# Altium PCB 舱内通信板.PcbDoc
Units mm, origin at the board's own origin, x right, y up, seen from the top; angles counter-clockwise.
Board outline 80.68 x 81.51 mm, 2 copper layers (Top Layer, Bottom Layer); 35 components, 69 nets, 221 pads, 77 vias.
Unrouted connection lines stored in the file: 1.
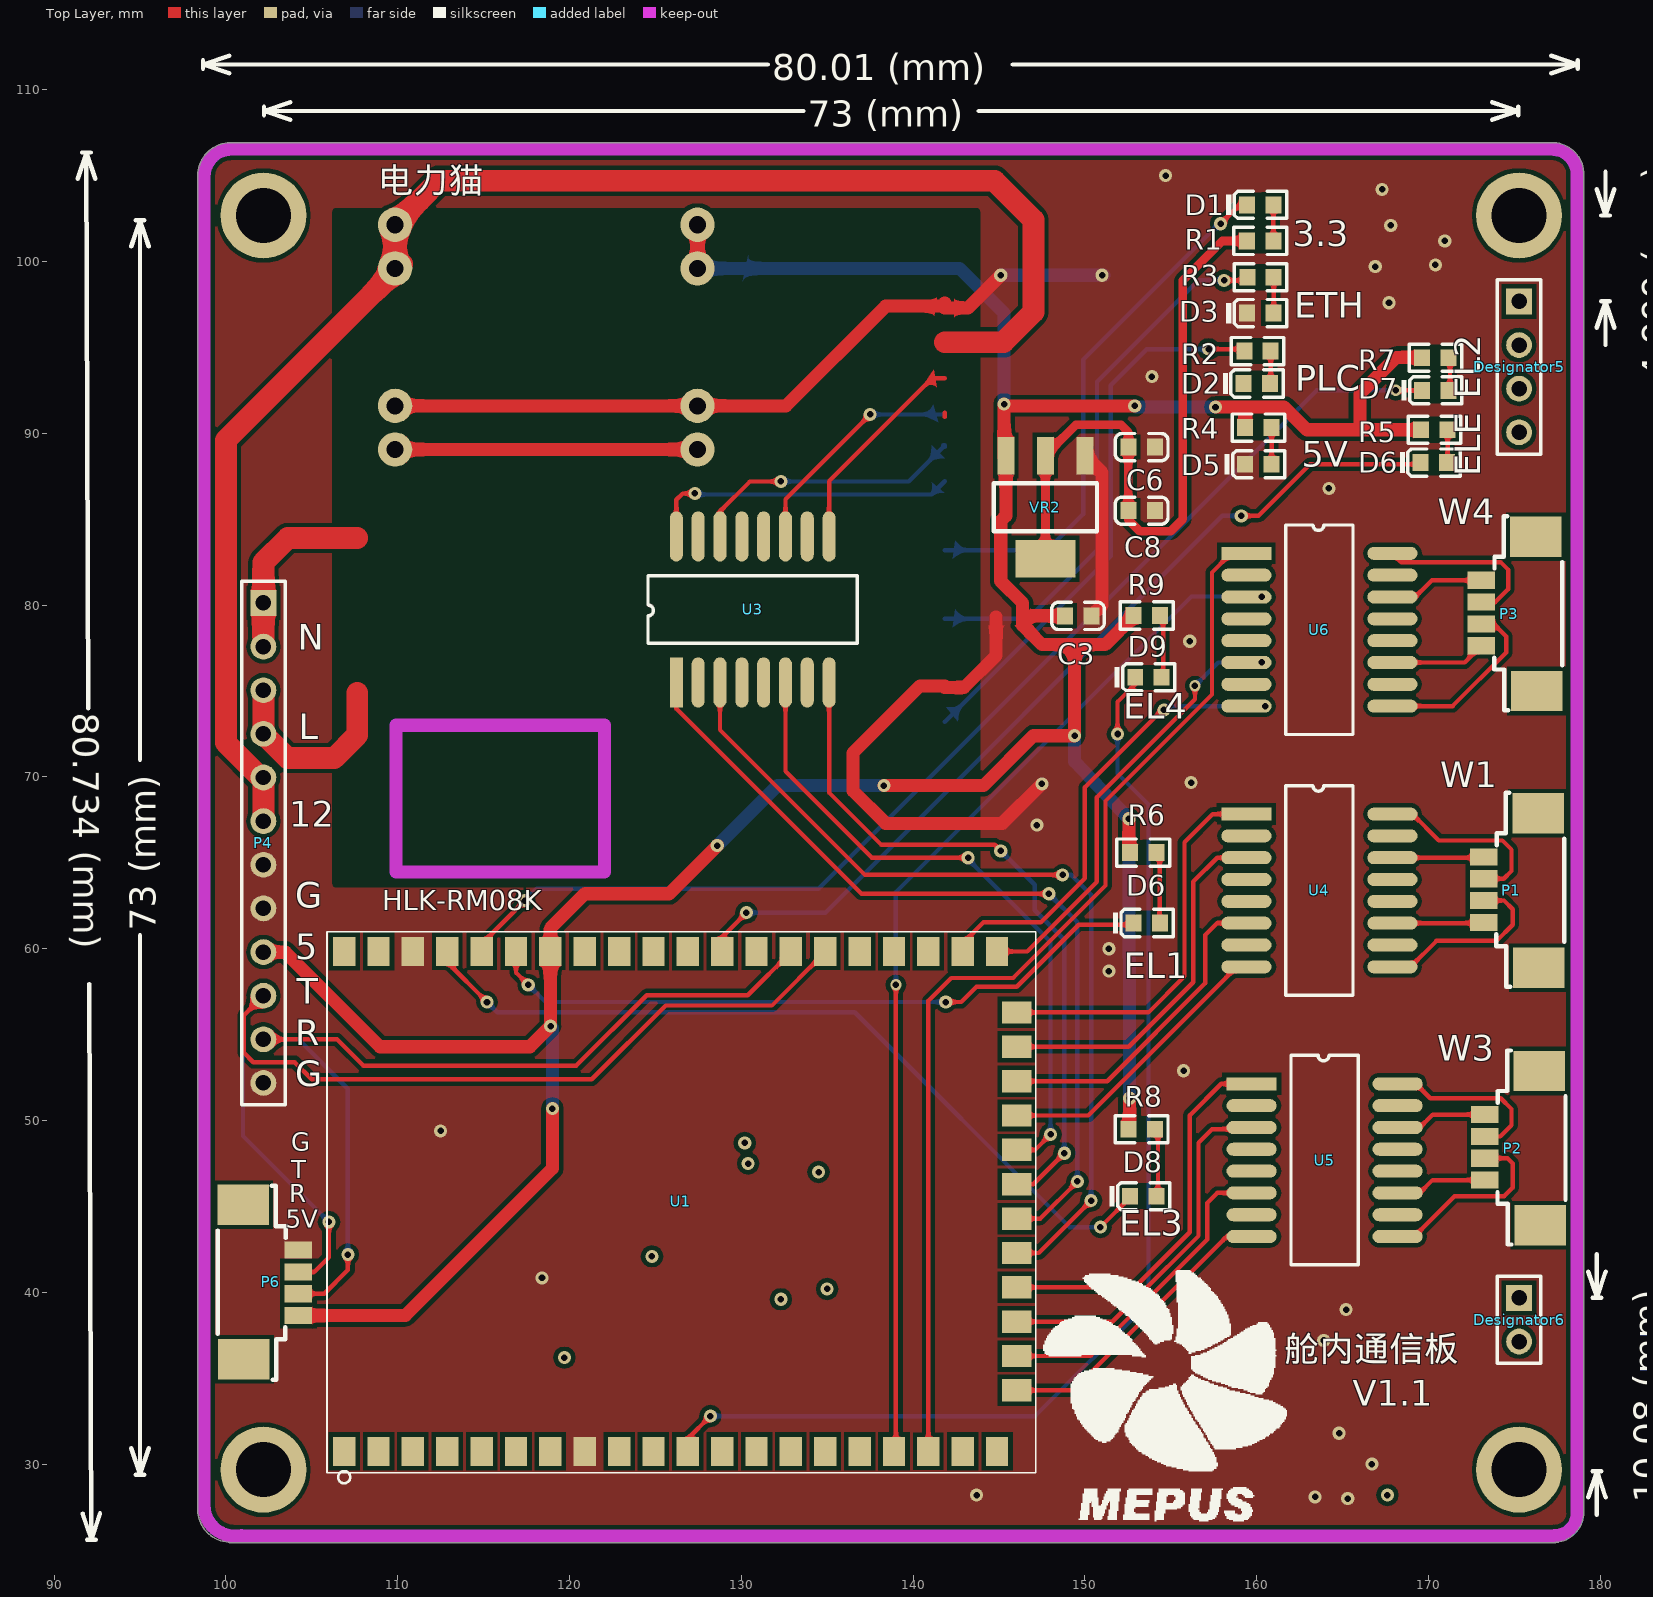
[diagram p0: Top Layer view]
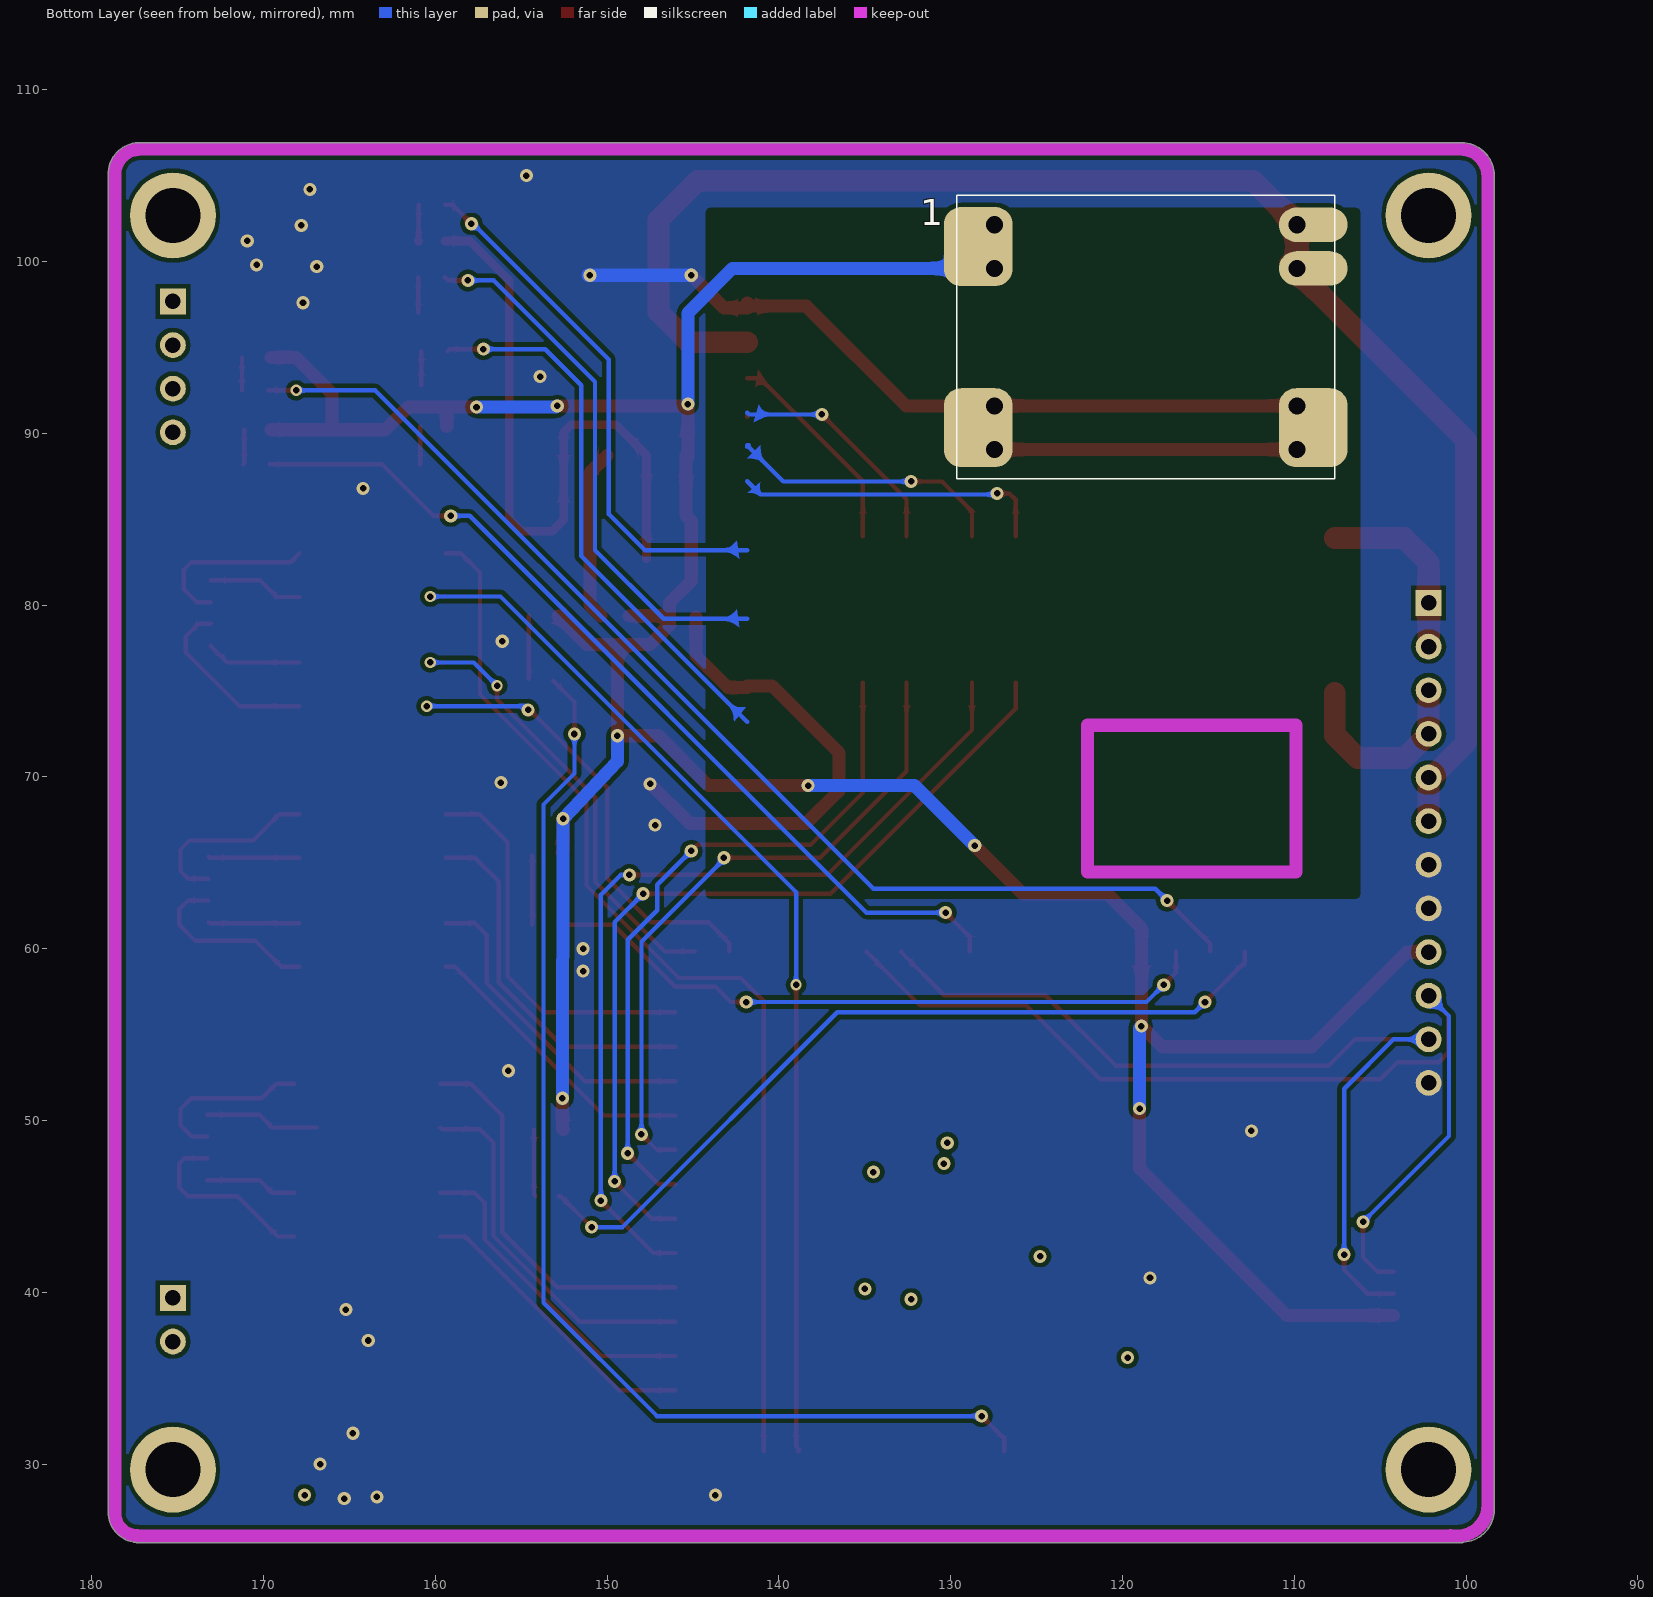
[diagram p1: Bottom Layer view, seen from below]
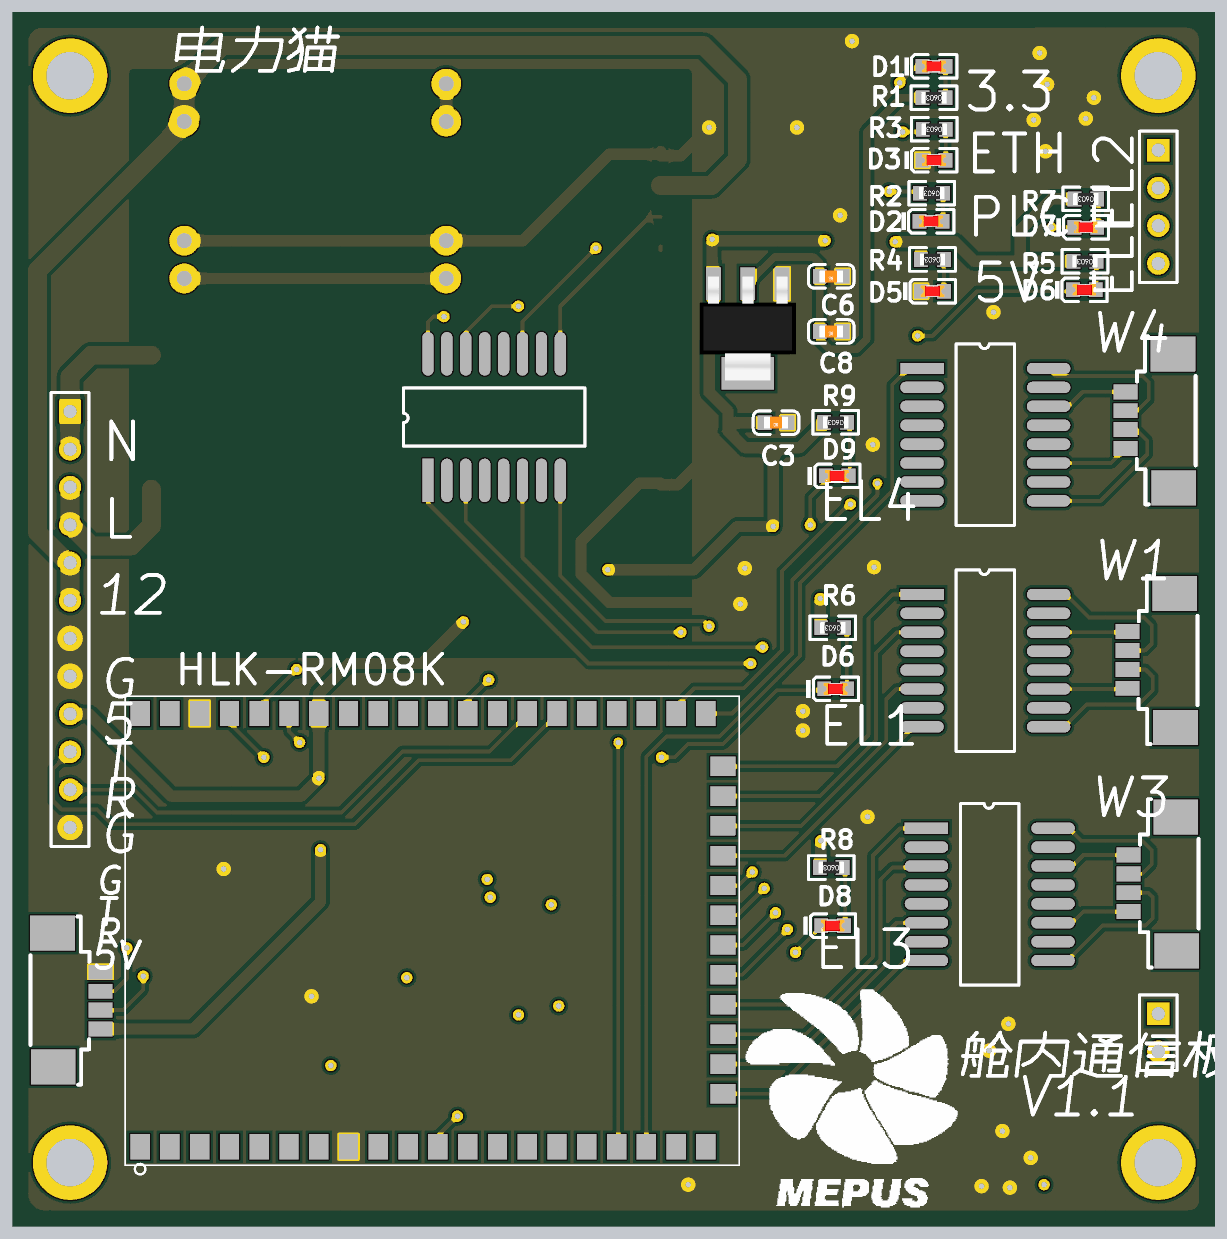
[diagram p2: 3D render of the assembled board from above, using the file's embedded part models]

## Layer stack, top to bottom
Top Solder: solder mask 0.0102, Solder Resist, Dk 3.5
Top Layer: signal copper 0.0356
Dielectric 1: dielectric 0.32, FR-4, Dk 4.8
Bottom Layer: signal copper 0.0356
Bottom Solder: solder mask 0.0102, Solder Resist, Dk 3.5

## Board outline
98.356,27.35 ccw(c100.273,27.375) 100.149,25.462 ccw(c100.33,25.798) 100.33,25.417 177.272,25.417 ccw(c177.272,25.798) 177.429,25.451 ccw(c177.272,27.212) 179.04,27.212 ccw(c178.658,27.212) 179.04,27.221 ccw(c178.658,27.225) 179.04,27.225 ccw(c178.658,27.225) 179.04,27.229 179.033,27.937 ccw(c178.659,28.011) 179.04,28.011 179.04,105.08 ccw(c177.19,105.08) 177.317,106.925 ccw(c177.291,106.545) 177.196,106.914 100.283,106.914 ccw(c100.283,106.533) 100.261,106.914 ccw(c100.283,104.987) 98.356,104.987 98.356,27.355 ccw(c98.738,27.355)

## Design rules (kind name [scope] priority, off if disabled: settings)
Clearance [All] p1: gap=0.254 ignorepadtopadclearanceinfootprint=FALSE
ComponentClearance [All] p1 off: gap=0.254 collisioncheckmode=3 verticalgap=0.254 showdistances=FALSE
Height [All] p1 off: minheight=0 maxheight=25.4 prefheight=12.7
HoleSize [All] p1: absolutevalues=TRUE maxlimit=12.7 minlimit=0.025 maxpercent=80.000 minpercent=20.000
PlaneConnect [All] p1: planeconnectstyle=Direct reliefexpansion=0.508 reliefentries=4 reliefconductorwidth=0.254 reliefairgap=0.254
PolygonConnect [All] p1: connectstyle=Direct reliefconductorwidth=0.254 reliefentries=4 polygonreliefangle="90 Angle" airgapwidth=0.254
RoutingVias [All] p1: holewidth=0.711 width=1.27 viastyle="Through Hole" minholewidth=0.711 minwidth=1.27 maxholewidth=0.711 maxwidth=1.27
SolderMaskExpansion [All] p1: expansion=0.102
UnRoutedNet [All] p1: checkbadconnections=TRUE
Width [All] p1: maxlimit=12.7 minlimit=0.254 preferedwidth=0.254 minimp=50.000000 maximp=50.000000 favimp=50.000000
25 further rules are at their usual default settings.

## Classes and differential pairs
component class 舱内通信板: 1 C3 C6 C8 D1 D5 OUT1 P1 P2 P3 P4 P6 R1 R2 R3 R4 R5 R6 R7 R8 R9 U1 U3 U4 U5 U6 VR2

## Components (designator, comment, footprint, x,y, rotation, side; value= is the part's Value field where it differs from the comment)
1 "12-5稳压" 12-5稳压 117.6,93.7 r180 bottom
C3 "100nF (104) 10% 50V" LC-0603_C 149.6,79.375 r180 top
C6 "10uF (106) 10% 10V" LC-0603_C 153.3,89.2 r180 top
C8 "100nF (104) 10% 50V" LC-0603_C 153.3,85.5 r180 top
D1 "红灯 0603" LC-0603_LED_S1 160.2,103.3 r0 top
D2 "Comment" LC-0603_LED_S1 160,92.9 r0 top
D3 "Comment" LC-0603_LED_S1 160.2,97 r0 top
D5 "红灯 0603" LC-0603_LED_S1 160.1,88.2 r0 top
D6 "Comment" LC-0603_LED_S1 170.3,88.3 r0 top
D6 "Comment" LC-0603_LED_S1 153.6,61.5 r0 top
D7 "Comment" LC-0603_LED_S1 170.4,92.5 r0 top
D8 "Comment" LC-0603_LED_S1 153.4,45.6 r0 top
D9 "Comment" LC-0603_LED_S1 153.7,75.8 r0 top
Designator5 "Comment" HDR1X4 175.268,97.68 r270 top
Designator6 "Comment" HDR1X2 175.268,39.68 r270 top
P1 "Header 4" Molex-4 175.523,62.2 r270 top
P2 "Header 4" Molex-4 175.6,47.2 r270 top
P3 "Header 4" Molex-4 175.4,78.3 r270 top
P4 "Header 12" HDR1X12 102.184,80.129 r270 top
P6 "Header 4" Molex-4 101.9,41.8 r90 top
R1 "1KΩ (1001) ±1%" LC-0603_R 160.2,101.2 r180 top
R2 "1KΩ (1001) ±1%" LC-0603_R 160.045,94.787 r180 top
R3 "1KΩ (1001) ±1%" LC-0603_R 160.22,99.084 r180 top
R4 "1KΩ (1001) ±1%" LC-0603_R 160.1,90.334 r180 top
R5 "1KΩ (1001) ±1%" LC-0603_R 170.342,90.208 r180 top
R6 "1KΩ (1001) ±1%" LC-0603_R 153.4,65.6 r180 top
R7 "1KΩ (1001) ±1%" LC-0603_R 170.4,94.4 r180 top
R8 "1KΩ (1001) ±1%" LC-0603_R 153.3,49.5 r180 top
R9 "1KΩ (1001) ±1%" LC-0603_R 153.6,79.4 r180 top
U1 "HLK-RM08K" RM08k 126.4,45.3 r0 top
U3 "H1102NL" H1102NL 126.22,75.5 r90 top
U4 "H1102NL" H1102NL 159.4,67.84 r0 top
U5 "H1102NL" H1102NL 159.7,52.14 r0 top
U6 "H1102NL" H1102NL 159.4,83.014 r0 top
VR2 "AMS1117-3.3" LC-SOT-223 147.7,85.7 r90 top

## Footprints (in the part's own frame and the unit in brackets; to place one, negate y for a bottom-side part, rotate by r counter-clockwise, add the part's x,y. Pads: shape width x height; smd on the part's side, far side on the other; paste and mask are expansions set on the pad)
12-5稳压 [mm]
  round 2 hole 1: EN(7.75,8.44) VI+(7.75,5.9) VI-(7.75,-4.64) VI-(7.75,-2.1) VO+(-9.85,5.9) VO+(-9.85,8.44) VO-(-9.85,-4.64) VO-(-9.85,-2.1)
  oval 4x2 smd: EN(8.7,8.44) VI+(8.7,5.9)
  rrect50% 4x4.6 smd: VI-(8.7,-3.37) VO+(-10.8,7.17) VO-(-10.8,-3.37)
  silkscreen extent -12.05,-6.35 9.95,10.15
H1102NL [mm]
  rect 2.92x0.76 smd: 1(0,0)
  oval 2.92x0.76 smd: 2(0,-1.27) 3(0,-2.54) 4(0,-3.81) 5(0,-5.08) 6(0,-6.35) 7(0,-7.62) 8(0,-8.89) 9(8.5,-8.89) 10(8.5,-7.62) 11(8.5,-6.35) 12(8.5,-5.08) 13(8.5,-3.81) 14(8.5,-2.54) 15(8.5,-1.27) 16(8.5,0)
  silkscreen extent 2.29,-10.54 6.21,1.65
HDR1X2 [mm] "Connector; Header; 2 Position"
  rect 1.5x1.5 hole 0.9: 1(0,0)
  round 1.5 hole 0.9: 2(2.54,0)
  silkscreen extent -1.27,-1.27 3.81,1.27
HDR1X4 [mm] "Connector; Header; 4 Position"
  rect 1.5x1.5 hole 0.9: 1(0,0)
  round 1.5 hole 0.9: 2(2.54,0) 3(5.08,0) 4(7.62,0)
  silkscreen extent -1.27,-1.27 8.89,1.27
HDR1X12 [mm] "Connector; Header; 12 Position"
  rect 1.5x1.5 hole 0.9: 1(0,0)
  round 1.5 hole 0.9: 2(2.54,0) 3(5.08,0) 4(7.62,0) 5(10.16,0) 6(12.7,0) 7(15.24,0) 8(17.78,0) 9(20.32,0) 10(22.86,0) 11(25.4,0) 12(27.94,0)
  silkscreen extent -1.27,-1.27 29.21,1.27
LC-0603_C [mm]
  rect 0.93x0.98 smd: 1(-0.77,0) 2(0.77,0)
  silkscreen extent -1.53,-0.79 1.54,0.79, body extent -0.8,-0.4 0.8,0.4, height 0.3
LC-0603_LED_S1 [mm]
  rect 0.93x0.98 smd: A(0.77,0) K(-0.77,0)
  silkscreen extent -1.97,-0.79 1.54,0.79, body extent -0.8,-0.4 0.8,0.4, height 0.6
LC-0603_R [mm]
  rect 0.93x0.98 smd: 1(-0.77,0) 2(0.77,0)
  silkscreen extent -1.53,-0.79 1.54,0.79, body extent -0.85,-0.4 0.85,0.4, height 0.56
LC-SOT-223 [mm]
  rect 2.2x1 smd: 1(3,-2.3) 2(3,0) 3(3,2.3)
  rect 2.2x3.5 smd: 2(-3,0)
  silkscreen extent -1.4,-3 1.4,3, body extent -3.49,-3.24 3.49,3.24, height 1.64
Molex-4 [mm]
  rect 2.35x3 smd: 0(-5.687,0.852) 0(3.3,0.901)
  rect 1x1.6 smd: 1(-3.147,-2.323) 2(-1.877,-2.323) 3(-0.607,-2.323) 4(0.663,-2.323)
  silkscreen extent -6.88,-1.58 4.41,2.38
RM08k [mm]
  rect 1.3x1.7 smd: 1(-19.513,-14.555) 2(-17.513,-14.555) 3(-15.513,-14.555) 4(-13.513,-14.555) 5(-11.513,-14.555) 6(-9.513,-14.555) 7(-7.513,-14.555) 8(-5.513,-14.555) 9(-3.513,-14.555) 10(-1.513,-14.555) 11(0.487,-14.555) 12(2.487,-14.555) 13(4.487,-14.555) 14(6.487,-14.555) 15(8.487,-14.555) 16(10.487,-14.555) 17(12.487,-14.555) 18(14.487,-14.555) 19(16.487,-14.555) 20(18.487,-14.555) 33(18.487,14.545) 34(16.487,14.545) 35(14.487,14.545) 36(12.487,14.545) 37(10.487,14.545) 38(8.487,14.545) 39(6.487,14.545) 40(4.487,14.545) 41(2.487,14.545) 42(0.487,14.545) 43(-1.513,14.545) 44(-3.513,14.545) 45(-5.513,14.545) 46(-7.513,14.545) 47(-9.513,14.545) 48(-11.513,14.545) 49(-13.513,14.545) 50(-15.513,14.545) 51(-17.513,14.545) 52(-19.513,14.545)
  rect 1.7x1.3 smd: 21(19.637,-11.005) 22(19.637,-9.005) 23(19.637,-7.005) 24(19.637,-5.005) 25(19.637,-3.005) 26(19.637,-1.005) 27(19.637,0.995) 28(19.637,2.995) 29(19.637,4.995) 30(19.637,6.995) 31(19.637,8.995) 32(19.637,10.995)
  silkscreen extent -20.51,-16.41 20.74,15.7

## Part data
C3 C8: library part "0603 100nF (104) 10% 50V", "贴片电容", Package=0603, SuppliersPartNumber=C14663, ComponentLink1Description=供应商, ComponentLink1URL=http://www.szlcsc.com/product/details_15331.html, Supplier=LC
C6: library part "0603 10uF (106) 10% 10V", "贴片电容", Package=0603, SuppliersPartNumber=C19702, ComponentLink1Description=供应商, ComponentLink1URL=http://www.szlcsc.com/product/details_20411.html, Supplier=LC
D1 D5: library part "0603 红灯", "发光二极管", Package=0603, SuppliersPartNumber=C2286, ComponentLink1Description=供应商, ComponentLink1URL=http://www.szlcsc.com/product/details_2659.html, Supplier=LC
D2 D3: library part "0603 绿灯", "发光二极管"
D6 D7 D8 D9: library part "0603 蓝灯", "发光二极管"
P1 P2 P3 P6: "Header, 4-Pin", LatestRevisionDate=17-Jul-2002, LatestRevisionNote="Re-released for DXP Platform.", Publisher="Altium Limited"
P4: "Header, 12-Pin", LatestRevisionDate=17-Jul-2002, LatestRevisionNote="Re-released for DXP Platform.", Publisher="Altium Limited"
R1 R2 R3 R4 R5 R6 R7 R8 R9: library part "0603 1KΩ (1001) 1%", "贴片电阻", Package=0603, SuppliersPartNumber=C21190, ComponentLink1Description=供应商, ComponentLink1URL=http://www.szlcsc.com/product/details_21904.html, Supplier=LC
U1: library part RM08K, "RM08K WIFI MODEL"
U3 U4 U5 U6: "网口变压器"
VR2: library part "SOT-223 AMS1117-3.3", "低压差线性稳压(LDO)", Package=SOT-223, SuppliersPartNumber=C6186, ComponentLink1Description=供应商, ComponentLink1URL=http://www.szlcsc.com/product/details_6652.html, Supplier=LC

## Free pads (board coordinates)
  round 5 hole 3.2: 1(102.184,102.679) ""(102.184,29.68) ""(175.268,29.68) ""(175.268,102.679)

## Via types
v1: diameter 0.762, hole 0.381, Top Layer to Bottom Layer, 71 vias
v2: diameter 0.66, hole 0.381, Top Layer to Bottom Layer, 6 vias

## Nets (pads, with @x,y where several pads share a name; then routed paths per layer and width w, separated by ;. In a path a pad name is that pad's centre, name@x,y a point inside that pad or via, vN(x,y) a via of type N, cw(c..) or ccw(c..) an arc to the next point about the centre after c; other vN are vias at no path point)
3.3V: C6.2 C8.2 R1.2 VR2.2 | length 39.2
  Top Layer w0.508: VR2.2@147.7,82.7 147.7,88.7 147.7,88.718 149.482,90.5 152.1,90.5 152.53,90.07 C6.2 C8.2 152.53,84.97 153.2,84.3 155,84.3 155.7,85 155.7,98.9 158,101.2 R1.2
+5V: 1.VO+ C3.2 P4.9 P6.1 R4.2 R5.2 R6.2 R7.2 R8.2 R9.2 U1.46 VR2.3 | length 201.4
  Top Layer w0.762: P4.9 103.46,59.809 108.974,54.295 117.695,54.295 118.887,55.487 U1.46 118.887,61.187 120.9,63.2 125.8,63.2 v1(128.6,66) ; P6.1 110.44,38.653 119,47.213 v1(119,50.7) ; 1.VO+@127.45,99.6 1.VO+@127.45,102.14 ; v1(138.3,69.5) 144.1,69.5 147,72.4 v1(149.4,72.4) 149.4,77.7 ; 146.625,79.375 C3.2@148.73,79.375 ; R8.2@152.55,49.475 152.6,49.525 v1(152.6,51.3) ; v1(152.56,67.57) 152.56,65.67 R6.2 ; R9.2@152.85,79.375 151.175,77.7 149.4,77.7 ; v1(152.9,91.6) 145.4,91.6 v1(145.3,91.7) 145.3,88.6 VR2.3 145.4,85.2 145.1,84.9 145.1,81.4 146.37,80.13 146.37,79.3 146.37,78.83 147.5,77.7 149.4,77.7 ; v1(157.6,91.525) 159.196,91.525 ; R4.2@159.33,90.4 159.33,91.391 159.196,91.525 ; R7.2@169.55,94.425 168.125,94.425 166,92.3 166,90.308 165.9,90.208 ; R5.2 165.9,90.208 ; 159.196,91.525 161.598,91.525 162.915,90.208 165.9,90.208
  Bottom Layer w0.762: v1(118.9,55.5) 119,55.4 v1(119,50.7) ; 1.VO+@127.45,99.6 142.7,99.6 145.3,97 v1(145.3,91.7) ; v1(128.6,66) 132.1,69.5 v1(138.3,69.5) ; v1(149.4,72.4) 149.4,70.9 v1(152.56,67.57) v1(152.6,51.3) ; v1(152.9,91.6) 152.975,91.525 v1(157.6,91.525)
+12V: 1.EN 1.VI+ P4.5 P4.6 | length 91.3
  Top Layer w1.27: P4.6 P4.5@102.184,69.816 ; P4.5 P4.5@102.184,69.816 ; 1.VI+@109.85,99.6 109.85,102.14 111.739,104.029 ; 1.VI+@110.25,99.85 109.925,99.525 100,89.6 100,72 P4.5@102.184,69.816 ; 111.3,103.6 112.4,104.7 144.73,104.7 147,102.43 147,97.051 145.253,95.304 141.844,95.304
EL1: D6.K@152.83,61.5 U1.47 | length 39.7
  Top Layer w0.254: U1.47 116.887,58.613 v1(117.6,57.9) ; v1(141.9,56.9) 142.8,56.9 143.692,57.792 146.029,57.792 149.637,61.4 D6.K@152.83,61.4
  Bottom Layer w0.254: v1(117.6,57.9) 118.6,56.9 v1(141.9,56.9)
EL2: D7.K U1.48 | length 68.6
  Top Layer w0.254: U1.48 114.887,60.287 v1(117.4,62.8) ; v2(168.1,92.5) D7.K@169.73,92.5
  Bottom Layer w0.254: v1(117.4,62.8) 118.1,63.5 134.5,63.5 163.5,92.5 v2(168.1,92.5)
EL3: D8.K U1.49 | length 47.7
  Top Layer w0.254: U1.49 112.887,59.213 v1(115.2,56.9) ; v1(150.9,43.8) 152.7,45.6 D8.K@152.83,45.6
  Bottom Layer w0.254: v1(115.2,56.9) 115.8,56.3 136.6,56.3 149.1,43.8 v1(150.9,43.8)
EL4: D9.K U1.11 | length 68.3
  Top Layer w0.254: U1.11 126.887,31.487 v1(128.2,32.8) ; v1(151.9,72.5) 151.9,74.37 D9.K@153.13,75.6
  Bottom Layer w0.254: v1(128.2,32.8) 147.1,32.8 153.7,39.4 153.7,68.4 151.9,70.2 v1(151.9,72.5)
ELED0: D6.K@169.53,88.3 U1.41 | length 53
  Top Layer w0.254: U1.41 128.887,60.687 v1(130.3,62.1) ; v1(159.1,85.2) 160.1,85.2 163.1,88.2 D6.K@169.63,88.2
  Bottom Layer w0.254: v1(130.3,62.1) 134.9,62.1 158,85.2 v1(159.1,85.2)
ES0: U1.16
ES1: U1.43
ETH2: R3.2 | length 31.6
  Top Layer w0.254: v1(158.1,98.9) 159.266,98.9 R3.2
  Bottom Layer w0.254: 141.844,79.204 146.704,79.204 150.7,83.2 150.7,93 156.6,98.9 v1(158.1,98.9)
GND: 1.VI- 1.VO- C3.1 C6.1 C8.1 D3.K D5.K P4.7 P4.8 P4.12 P6.4 U1.8 U1.50 VR2.1 | length 100.3
  Top Layer w0.762: 1.VI-@109.85,89.06 1.VO-@127.45,89.06 ; 1.VI-@109.85,91.6 127.45,91.6 132.6,91.6 138.4,97.4 141.664,97.4 141.844,97.58 141.844,97.304 143.204,97.304 v1(145.1,99.2) ; 141.844,75.204 142.964,75.204 144.83,77.07 144.83,79.3 ; 141.844,75.304 140.4,75.304 136.5,71.404 136.5,69.2 138.4,67.3 145.2,67.3 v1(147.5,69.6) ; VR2.1 151,87.7 151,80.005 C3.1
  Bottom Layer w0.762: v1(145.1,99.2) v1(151,99.2) v1@151.1,99.2
  other v1: 165.3,28 163.4,28.1 143.7,28.2 166.7,30 164.8,31.8 163.9,37.2 165.2,39 118.4,40.847 112.5,49.4 155.741,52.9 151.4,58.7 151.4,60 147.2,67.2 156.179,69.675 156.1,77.9 164.2,86.8 153.9,93.3 167.7,97.6 166.9,99.7 170.4,99.8 170.942,101.2 167.8,102.1 167.3,104.2 154.7,105
L: P4.3 P4.4 | length 11.6
  Top Layer w1.27: P4.3 P4.4 103.593,71.1 106.3,71.1 107.644,72.444 107.644,74.904
N: P4.1 P4.2 | length 10.9
  Top Layer w1.27: P4.2 P4.1 102.184,82.484 103.604,83.904 107.644,83.904
NetD1_A: D1.A R1.1 | length 2.1
  Top Layer w0.254: R1.1 D1.A
NetD1_K: D1.K | length 31.1
  Top Layer w0.254: v1(157.9,102.2) 159,103.3 D1.K
  Bottom Layer w0.254: 141.844,83.204 147.804,83.204 149.9,85.3 149.9,94.3 v1@157.8,102.2
NetD2_A: D2.A R2.1 | length 2
  Top Layer w0.254: D2.A@160.815,92.806 R2.1
NetD3_A: D3.A R3.1 | length 2.1
  Top Layer w0.254: D3.A@160.99,97.02 R3.1
NetD4_A: D6.A@154.37,61.5 R6.1 | length 4
  Top Layer w0.254: R6.1@154.35,65.425 154.35,61.42 D6.A@154.37,61.4
NetD5_A: D5.A R4.1 | length 2.2
  Top Layer w0.254: D5.A R4.1@160.87,90.4
NetD6_A: D6.A@171.07,88.3 R5.1 | length 2
  Top Layer w0.254: R5.1 171.112,88.258 D6.A@171.17,88.2
NetD7_A: D7.A R7.1 | length 1.9
  Top Layer w0.254: R7.1@171.25,94.425 171.25,92.52 D7.A@171.27,92.5
NetD8_A: D8.A R8.1 | length 3.9
  Top Layer w0.254: D8.A 154.25,45.68 R8.1@154.25,49.475
NetD9_A: D9.A R9.1 | length 3.7
  Top Layer w0.254: D9.A@154.55,75.72 R9.1@154.55,79.375
PLC2: R2.2 | length 32.3
  Top Layer w0.254: v1(157.2,94.9) 159.162,94.9 R2.2
  Bottom Layer w0.254: 141.844,73.204 151.5,82.86 151.5,92.8 153.6,94.9 v1(157.2,94.9)
RST: U1.42
RX: P4.11 P6.2 U1.39 | length 54.3
  Top Layer w0.254: P4.11 106.471,54.729 108,53.2 120.4,53.2 124.499,57.299 130.38,57.299 132.887,59.806 U1.39 ; P6.2 105.723,39.923 107.1,41.3 v1(107.1,42.2) v1@107.1,42.3
  Bottom Layer w0.254: P4.11 104.229,54.729 107.1,51.858 v1(107.1,42.2)
RX1: U1.40
RXN0: U1.20
RXN1: U1.29 U4.8 | length 16.9
  Top Layer w0.254: U1.29 150.195,50.295 158.85,58.95 U4.8
RXN2: U1.27 U3.8 | length 40.4
  Top Layer w0.254: U3.8 135.11,69.09 138.138,66.062 144.738,66.062 v1(145.1,65.7) ; U1.27 146.995,46.295 v1(148.8,48.1)
  Bottom Layer w0.254: v1(145.1,65.7) 147.08,63.72 147.08,62.238 148.8,60.518 v1(148.8,48.1)
RXN3: U1.21 U5.8 | length 17.4
  Top Layer w0.254: U1.21 146.042,34.3 149.3,34.3 158.25,43.25 U5.8
RXN4: U1.34 U6.8 | length 26.9
  Top Layer w0.254: U1.34 142.887,60.324 144.1,61.537 147.437,61.537 150,64.1 150,69.4 152.8,72.2 154.5,73.9 v1(154.6,73.9)
  Bottom Layer w0.254: v1(154.6,73.9) 154.824,74.124 v2(160.5,74.124)
RXP0: U1.19
RXP1: U1.30 U4.6 | length 18.8
  Top Layer w0.254: U1.30 151.295,52.295 157,58 157,60.8 157.69,61.49 U4.6
RXP2: U1.28 U3.6 | length 38.3
  Top Layer w0.254: U3.6 132.57,70.33 137.6,65.3 v1(143.2,65.3) ; U1.28 147.095,48.295 v1(148,49.2)
  Bottom Layer w0.254: v1(143.2,65.3) 143.2,65.204 148,60.404 v1(148,49.2)
RXP3: U1.22 U5.6 | length 18.8
  Top Layer w0.254: U1.22 150.332,36.295 157.116,43.079 157.116,45.206 157.7,45.79 U5.6
RXP4: U1.33 U6.6 | length 26.6
  Top Layer w0.254: U1.33 146.645,59.845 150.692,63.892 150.692,68.81 156.404,74.522 v2(156.404,75.308) v2@156.441,75.308 ; U6.6 v2(160.286,76.664)
  Bottom Layer w0.254: v2(156.404,75.308) 157.76,76.664 v2(160.286,76.664)
T'X: 
TPRX0+: P1.4 U4.11 | length 5.3
  Top Layer w0.254: U4.11 173.153,61.49 P1.4
TPRX0-: P1.3 U4.9 | length 10.8
  Top Layer w0.254: U4.9 168.95,58.95 170.456,60.456 173.958,60.456 174.9,61.398 174.9,62.3 174.393,62.807 P1.3
TPRX1+: U3.11 | length 13.8
  Top Layer w0.254: U3.11 132.57,86.17 v1(137.5,91.1) ; 141.844,90.948 141.844,91.204
  Bottom Layer w0.254: v1(137.5,91.1) 141.74,91.1 141.844,91.204
TPRX1-: U3.9 | length 12.4
  Top Layer w0.254: U3.9 135.11,87.21 141.104,93.204 141.844,93.204
TPRX2+: P2.4 U5.11 | length 5.4
  Top Layer w0.254: U5.11 169.49,45.79 170.237,46.537 P2.4
TPRX2-: P2.3 U5.9 | length 11
  Top Layer w0.254: U5.9 169.162,43.25 171.512,45.6 174.4,45.6 174.9,46.1 174.9,47.5 174.593,47.807 P2.3
TPRX3+: P3.4 U6.11 | length 5.6
  Top Layer w0.254: U6.11 172.104,76.664 P3.4
TPRX3-: P3.3 U6.9 | length 10.6
  Top Layer w0.254: U6.9 171.403,74.124 174.524,77.246 174.524,78.176 173.793,78.907 P3.3
TPTX0+: P1.2 U4.16 | length 10.8
  Top Layer w0.254: U4.16 169.06,67.84 170.6,66.3 174.3,66.3 174.83,65.77 174.83,64.53 174.377,64.077 P1.2
TPTX0-: P1.1 U4.14 | length 5.3
  Top Layer w0.254: U4.14 173.153,65.3 P1.1
TPTX1+: U3.16 | length 18.3
  Top Layer w0.254: U3.16 126.22,86.13 126.59,86.5 v1(127.3,86.5)
  Bottom Layer w0.254: v1(127.3,86.5) 127.362,86.438 141.066,86.438 141.838,87.21 141.844,87.204
TPTX1-: U3.14 | length 16.3
  Top Layer w0.254: U3.14 128.76,85.46 130.5,87.2 v1(132.3,87.2)
  Bottom Layer w0.254: v1(132.3,87.2) 139.74,87.2 141.794,89.254 ; 141.748,89.3 141.794,89.254 ; 141.844,89.204 141.794,89.254 ; 141.844,89.304 141.794,89.254
TPTX2+: P2.2 U5.16 | length 10
  Top Layer w0.254: U5.16 169.26,52.14 170.1,51.3 174.2,51.3 174.83,50.671 174.83,49.729 174.177,49.077 P2.2
TPTX2-: P2.1 U5.14 | length 6.7
  Top Layer w0.254: U5.14@166.9,49.6 U5.14 169.5,49.6 170.247,50.347 P2.1
TPTX3+: P3.2 U6.16 | length 10.1
  Top Layer w0.254: U6.16 168.409,82.505 174.195,82.505 174.63,82.07 174.63,80.93 173.877,80.177 P3.2
TPTX3-: P3.1 U6.14 | length 5.6
  Top Layer w0.254: U6.14 169.227,80.474 170.2,81.447 P3.1
TX: P4.10 P6.3 U1.38 | length 61.3
  Top Layer w0.254: P4.10 101.048,56.133 101.048,53.952 101.6,53.4 104,53.4 105,52.4 121.3,52.4 125.6,56.7 131.781,56.7 134.887,59.806 U1.38 ; P6.3 105.15,41.193 106,42.043 v1(106,44.1)
  Bottom Layer w0.254: P4.10 101,56.085 101,49.1 v1(106,44.1)
TX1: U1.44
TXN0: U1.35
TXN1: U1.31 U4.3 | length 21.4
  Top Layer w0.254: U1.31 152.55,54.295 156.308,58.053 156.308,63.908 157.7,65.3 U4.3
TXN2: U1.25 U3.3 | length 51.7
  Top Layer w0.254: U3.3 128.76,72.74 137.2,64.3 v1(148.7,64.3) ; U1.25 147.319,42.295 v1(150.362,45.338)
  Bottom Layer w0.254: v1(148.7,64.3) 149.2,64.3 150.362,63.138 v1(150.362,45.338)
TXN3: U1.23 U5.3 | length 21.5
  Top Layer w0.254: U1.23 151.595,38.295 153.087,39.787 153.105,39.787 156.608,43.29 156.608,48.708 157.4,49.5 159.6,49.5 U5.3
TXN4: U1.17 U6.3 | length 62
  Top Layer w0.254: U1.17 138.8,30.832 139,31.032 v2(139,57.9) ; U6.3 159.426,80.5 v2(160.286,80.5)
  Bottom Layer w0.254: v2(139,57.9) 139,63.3 156.2,80.5 v2(160.286,80.5)
TXP0: U1.36
TXP1: U1.32 U4.1 | length 22.7
  Top Layer w0.254: U1.32 153.695,56.295 155.8,58.4 155.8,66.2 157.44,67.84 U4.1
TXP2: U1.26 U3.1 | length 49.5
  Top Layer w0.254: U3.1 126.22,73.98 137,63.2 v1(147.9,63.2) ; U1.26 147.395,44.295 v1(149.562,46.462)
  Bottom Layer w0.254: v1(147.9,63.2) 149.562,61.538 v1(149.562,46.462)
TXP3: U1.24 U5.1 | length 22.6
  Top Layer w0.254: U1.24 152.895,40.295 156.1,43.5 156.1,50.3 157.94,52.14 U5.1
TXP4: U1.18 U6.1 | length 62.6
  Top Layer w0.254: U1.18 140.887,56.965 142.222,58.3 145.818,58.3 151.2,63.682 151.2,68.6 157.4,74.8 157.4,81.9 158.514,83.014 U6.1
WDG: U1.2
WIFI_LED: U1.9
pads on no net: D2.K Designator5.1 Designator5.2 Designator5.3 Designator5.4 Designator6.1 Designator6.2 P1.0 P2.0 P3.0 P6.0 U1.1 U1.3 U1.4 U1.5 U1.6 U1.7 U1.10 U1.12 U1.13 U1.14 U1.15 U1.37 U1.45 U1.51 U1.52 U3.2 U3.4 U3.5 U3.7 U3.10 U3.12 U3.13 U3.15 U4.2 U4.4 U4.5 U4.7 U4.10 U4.12 U4.13 U4.15 U5.2 U5.4 U5.5 U5.7 U5.10 U5.12 U5.13 U5.15 U6.2 U6.4 U6.5 U6.7 U6.10 U6.12 U6.13 U6.15
copper on no net:
  other v1: 167.6,28.2 119.7,36.2 132.3,39.6 135,40.2 124.8,42.1 134.5,47 130.4,47.5 130.2,48.7

## Polygon pours and split planes (outlines as drawn)
GND on Top Layer "Top Layer-GND" (solid, pour order 76): 98.8,106.539 98.9,106.439 98.9,25.7 99,25.8 178.7,25.8 178.648,25.852 178.648,106.2
no net on Top Layer "GND_L01_P-001" (solid, pour order 6): 148.844,77.522
GND on Bottom Layer "Bottom Layer-GND" (solid, pour order 78): 99,106.539 99,25.8 178.3,25.8 178.6,26.1 178.6,106.5

## Keep-outs
Keep-Out Layer:
  lines w0.254: 178.664,27.735 cw(c176.9,27.6) 178.669,27.6
  lines w0.762: 100.376,25.819 177.343,25.819 ; 100.9,25.841 100.607,25.826 cw(c100.513,27.607) 98.73,27.607 98.73,104.953 cw(c100.328,104.94) 100.353,106.539 166.952,106.539 166.967,106.553 170.942,106.553 177.273,106.553 177.292,106.534 cw(c177.19,105.08) 178.648,105.08 ; 177.343,25.843 ccw(c177.343,27.148) 178.648,27.148 178.648,105.207 ; 109.897,64.457 122.038,64.457 122.038,73.01 109.897,73.01 109.897,64.457

## Silkscreen, mask and mechanical layers (free items; w line width, h text height)
Top Overlay:
  drawing of 633 lines, arcs and shapes, not listed
  text "80.01 (mm)" at 131.79,110.554 h1.52
  text "73 (mm)" at 133.871,107.848 h1.52
  text "电力猫" at 108.9,103.5 h2.54
  text "3.3" at 162.1,100.4 h2.54
  text "ETH" at 162.18,96.239 h2.54
  text "4.999 (mm)" at 183.957,93.172 h1.52 r90
  text "PLC" at 162.254,91.993 h2.54
  text "EL2" at 173.5,92 h2.54 r90
  text "5V" at 162.62,87.571 h2.54
  text "ELE" at 173.5,87.5 h2.54 r90
  text "W4" at 170.528,84.2 h2.54
  text "N" at 104.185,76.9 h2.54
  text "80.734 (mm)" at 91.087,73.743 h1.52 r270.21
  text "EL4" at 152.245,72.9 h2.54
  text "L" at 104.229,71.7 h2.54
  text "W1" at 170.679,68.9 h2.54
  text "12" at 103.7,66.6 h2.54
  text "G" at 104.025,61.9 h2.54
  text "HLK-RM08K" at 109.093,61.849 h2
  text "73 (mm)" at 95.914,61.046 h1.52 r90
  text "5" at 104.025,58.9 h2.54
  text "EL1" at 152.271,57.8 h2.54
  text "T" at 104.138,56.3 h2.54
  text "R" at 104.025,53.9 h2.54
  text "W3" at 170.5,53 h2.54
  text "G" at 104.025,51.5 h2.54
  text "G" at 103.8,47.9 h1.78
  text "T" at 103.8,46.3 h1.78
  text "R" at 103.7,44.9 h1.78
  text "5V" at 103.5,43.4 h1.78
  text "EL3" at 152,42.8 h2.54
  text "舱内通信板" at 161.6,35.495 h2.54
  text "V1.1" at 165.6,32.895 h2.54
  text "10.08 (mm)" at 183.457,27.759 h1.52 r90
Mechanical 1:
  lines w0.254: 98.693,27.31 98.738,27.355 ; 177.279,106.533 177.291,106.545 ; 178.651,28.003 178.659,28.011
  lines w0.762: 98.738,104.987 98.738,27.355 ccw(c100.273,27.375) 100.375,25.843 ; 98.738,104.947 cw(c100.283,104.987) 100.283,106.532 177.279,106.533 ; 100.33,25.798 177.272,25.798 ; 177.272,25.825 ccw(c177.272,27.212) 178.658,27.212 ; 177.291,106.545 cw(c177.19,105.08) 178.659,105.08 178.659,28.011 ; 178.651,28.003 178.658,27.225 ; 109.897,64.457 122.038,64.457 122.038,73.01 109.897,73.01 109.897,64.457